# EAGLE board wire cut detection and Disruption System (EAGLE 9.7.0)

Size 228.79 x 100.55 mm. Coordinates in mm from the lower left corner, seen from the top.
Outline: 0,0 228.79,0 228.79,100.55 0,100.55 0,0
Copper layers (1*16): Top 0.035mm / dielectric 1.5mm / Bottom 0.035mm
Design rules "default": minimum track width 6mil, minimum drill 0.35mm, track to track 6mil, track to pad 6mil, pad to pad 6mil, via to via 6mil, smd to smd 6mil, copper to edge 40mil, drill to drill 6mil, minimum pad ring 10mil, minimum via ring 8mil, stop-mask expansion 4mil, vias tented up to drill 0mil, thermal gap 10mil

## Footprints (pad centres in the part's own frame; a part is rotated, then mirrored left to right if it is on the bottom)
BATTERY-GENERIC = drill 1.118 pad 3.15 octagon: + 2.54,0; - -2.54,0
LEDRD254W60D565H860B = drill 0.981 pad 1.581: 1 -1.27,0; 2 1.27,0
LEDRD254W60D565H860B_G = drill 0.981 pad 1.581: 1 -1.27,0; 2 1.27,0
LU-5-R = drill 0.8: 1 -6.35,-3.81; 5 3.81,-3.81; 6 6.35,-3.81; 7 6.35,3.81; 8 3.81,3.81; 12 -6.35,3.81
1X02 = drill 1.016 long: 1 -1.27,0; 2 1.27,0
PIEZO = drill 1 pad 1.6: 1 -3.5,0; 2 3.5,0
RESAD1016W63L850D250B = drill 0.83 pad 1.43: 1 -5.08,0; 2 5.08,0
SWITCH-MOMENTARY-PTH-6.5MM = drill 1.016 pad 1.88: 1 -3.251,2.261; 2 3.251,2.261; 3 -3.251,-2.261; 4 3.251,-2.261
ARDUINO-UNO-R3-SHIELD = drill 1.016 pad 1.88: 3.3V 24.13,-2.54; 5V 24.13,0; A0 24.13,12.7; A1 24.13,15.24; A2 24.13,17.78; A3 24.13,20.32; A4 24.13,22.86; A5 24.13,25.4; AREF -24.13,-13.97; D2 -24.13,20.32; D3 -24.13,17.78; D4 -24.13,15.24; D5 -24.13,12.7; D6 -24.13,10.16; D7 -24.13,7.62; D8 -24.13,3.81; D9 -24.13,1.27; D10 -24.13,-1.27; D11 -24.13,-3.81; D12 -24.13,-6.35; D13 -24.13,-8.89; GND@0 24.13,2.54; GND@1 24.13,5.08; GND@2 -24.13,-11.43; IOREF 24.13,-7.62; NC 24.13,-10.16; RES 24.13,-5.08; RX -24.13,25.4; SCL -24.13,-19.05; SDA -24.13,-16.51; TX -24.13,22.86; VIN 24.13,7.62

## Placement (x,y rotation side)
BAT1  9V  [BATTERY-GENERIC]  121.63,26.8 180 top
D1  RED  [LEDRD254W60D565H860B]  137.63,92.64 180 top
D3  GREEN  [LEDRD254W60D565H860B_G]  130.01,92.64 180 top
K1  RELAY-SPDT_LU-5-R  [LU-5-R]  162.08,42.13 180 top
L1  LIGHTBULB  [1X02]  221.67,24.84 0 top
PIEZO5V  PIEZO  [PIEZO]  217.05,81.29 0 top
R2  220  [RESAD1016W63L850D250B]  131.28,79.94 90 top
R4  10k  [RESAD1016W63L850D250B]  156.68,64.7 90 top
R5  220  [RESAD1016W63L850D250B]  138.9,79.94 90 top
S3  SWITCH_MOMENTARY  [SWITCH-MOMENTARY-PTH-6.5MM]  159.22,81.21 90 top
U1  ARDUINO-UNO-R3-SHIELD  [ARDUINO-UNO-R3-SHIELD]  29.84,34.52 180 top

## Library data of the parts
BAT1 K1 L1 PIEZO5V R2 R4 R5 S3 U1 = Tinkercad
D1 = Tinkercad; CATEGORY: Opto-Electronic; SUB-CATEGORY: LED; VALUE: LED_RED
D3 = Tinkercad; CATEGORY: Opto-Electronic; SUB-CATEGORY: LED; VALUE: LED_GREEN

## Nets
BAT1+: BAT1.+ L1.1 PIEZO5V.1
BAT1-: BAT1.- K1.1
D1_A: D1.1 R5.2
D3_A: D3.1 R2.2
PIEZO5V_2: K1.6 L1.2 PIEZO5V.2
U1_5V: S3.3 S3.4 U1.5V
U1_D2: R4.2 S3.1 S3.2 U1.D2
U1_D11: K1.5 U1.D11
U1_D12: R5.1 U1.D12
U1_D13: R2.1 U1.D13
U1_GND: D1.2 D3.2 K1.8 R4.1 U1.GND@0 U1.GND@1 U1.GND@2

## Tracks (layer width: path | path; a pad name or v marks a point on that pad's centre or on a via)
BAT1+  (2 unrouted)
BAT1-  (1 unrouted)
D1_A  (1 unrouted)
D3_A  (1 unrouted)
PIEZO5V_2  (2 unrouted)
U1_5V  (2 unrouted)
U1_D2  (3 unrouted)
U1_D11  (1 unrouted)
U1_D12  (1 unrouted)
U1_D13  (1 unrouted)
U1_GND  (6 unrouted)